# EAGLE board PCB_v35 (EAGLE 9.7.0)
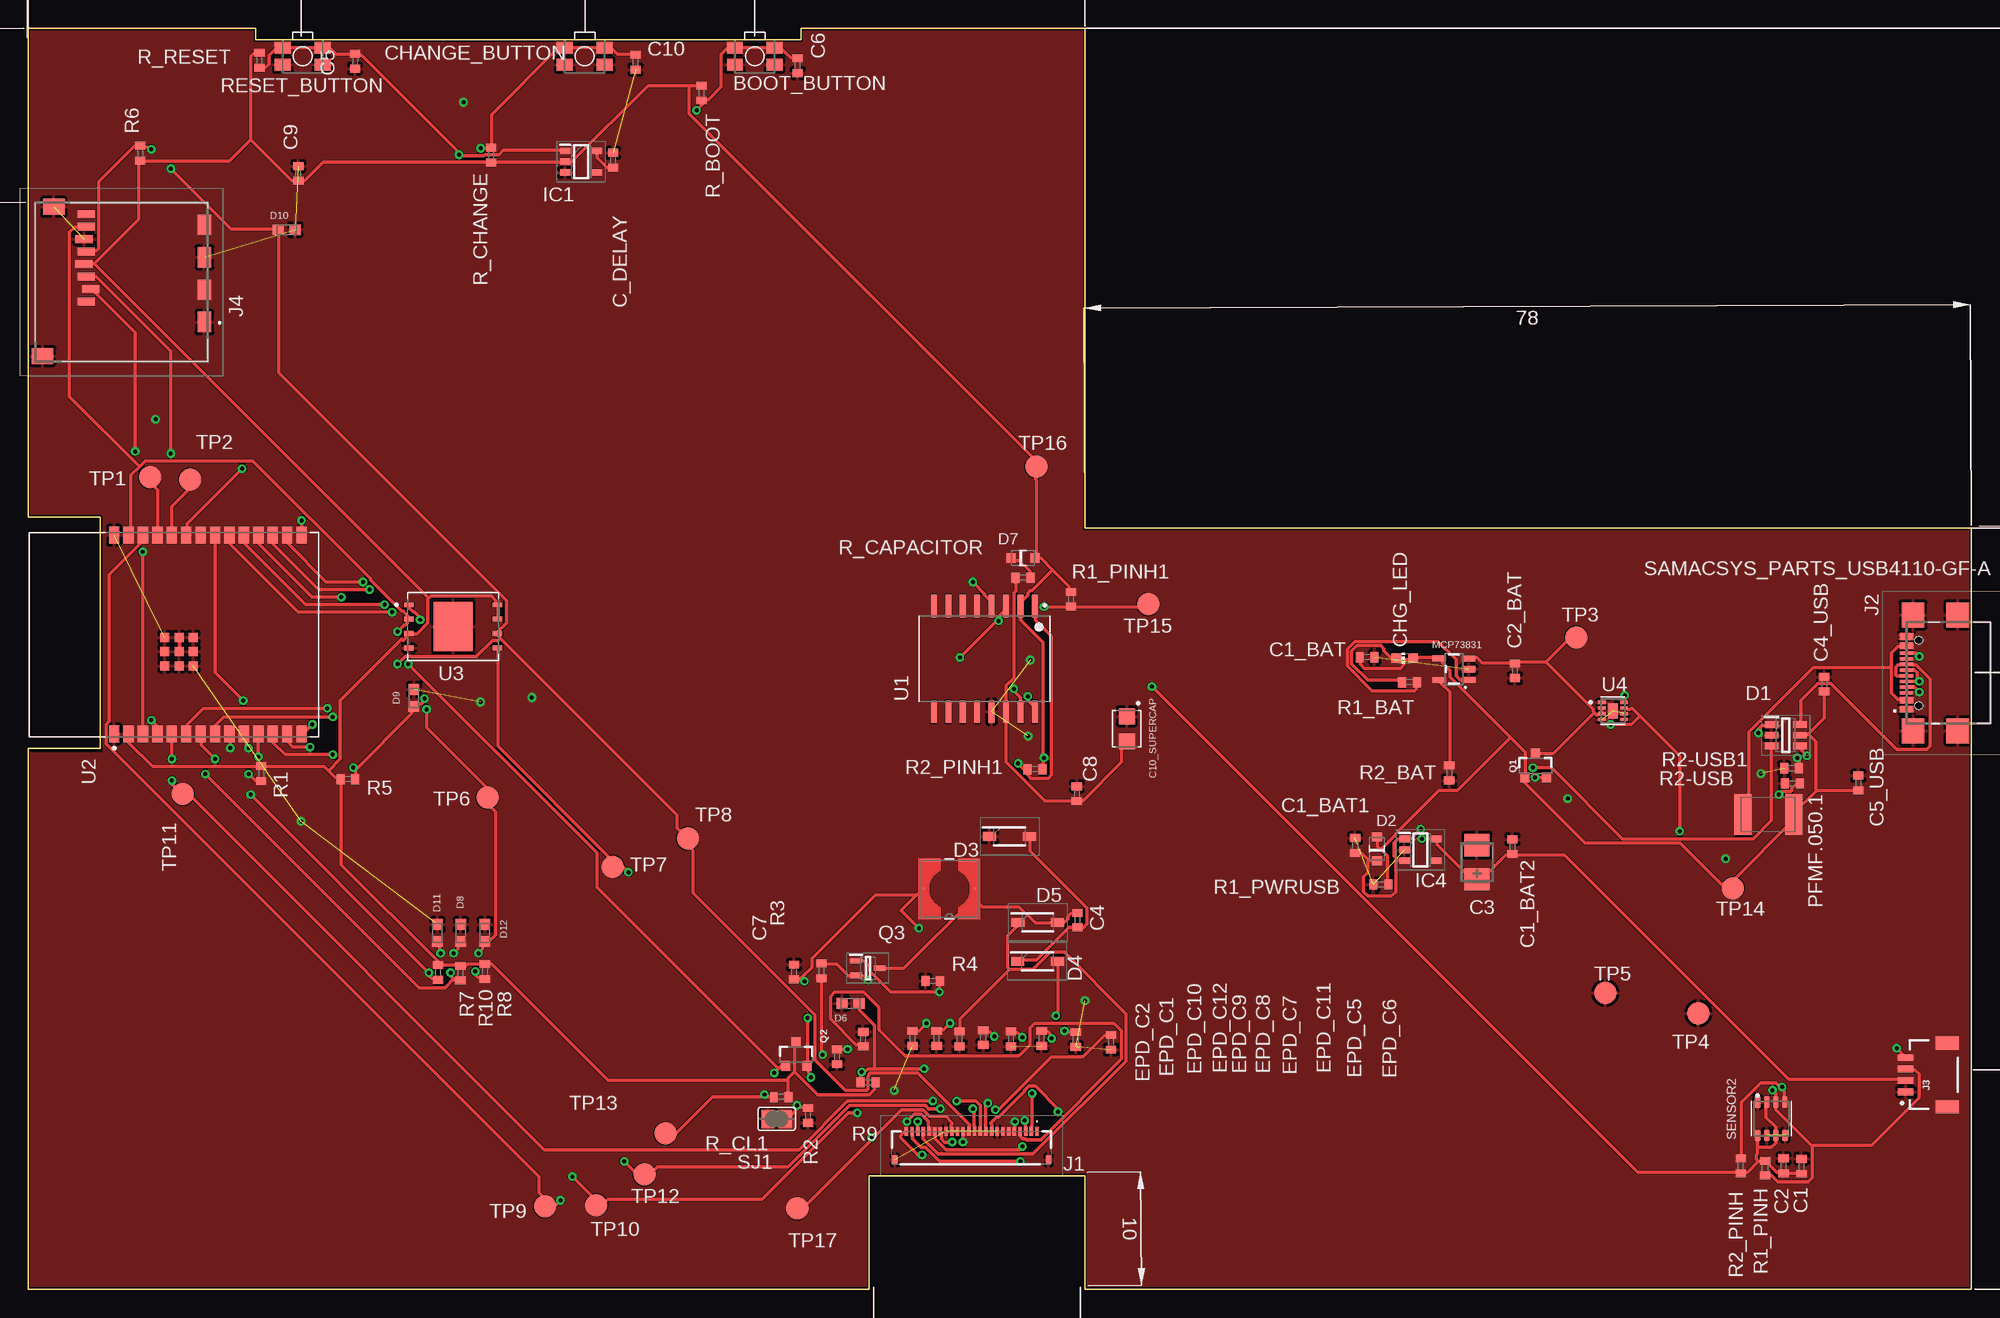
[diagram p0: board, top side]
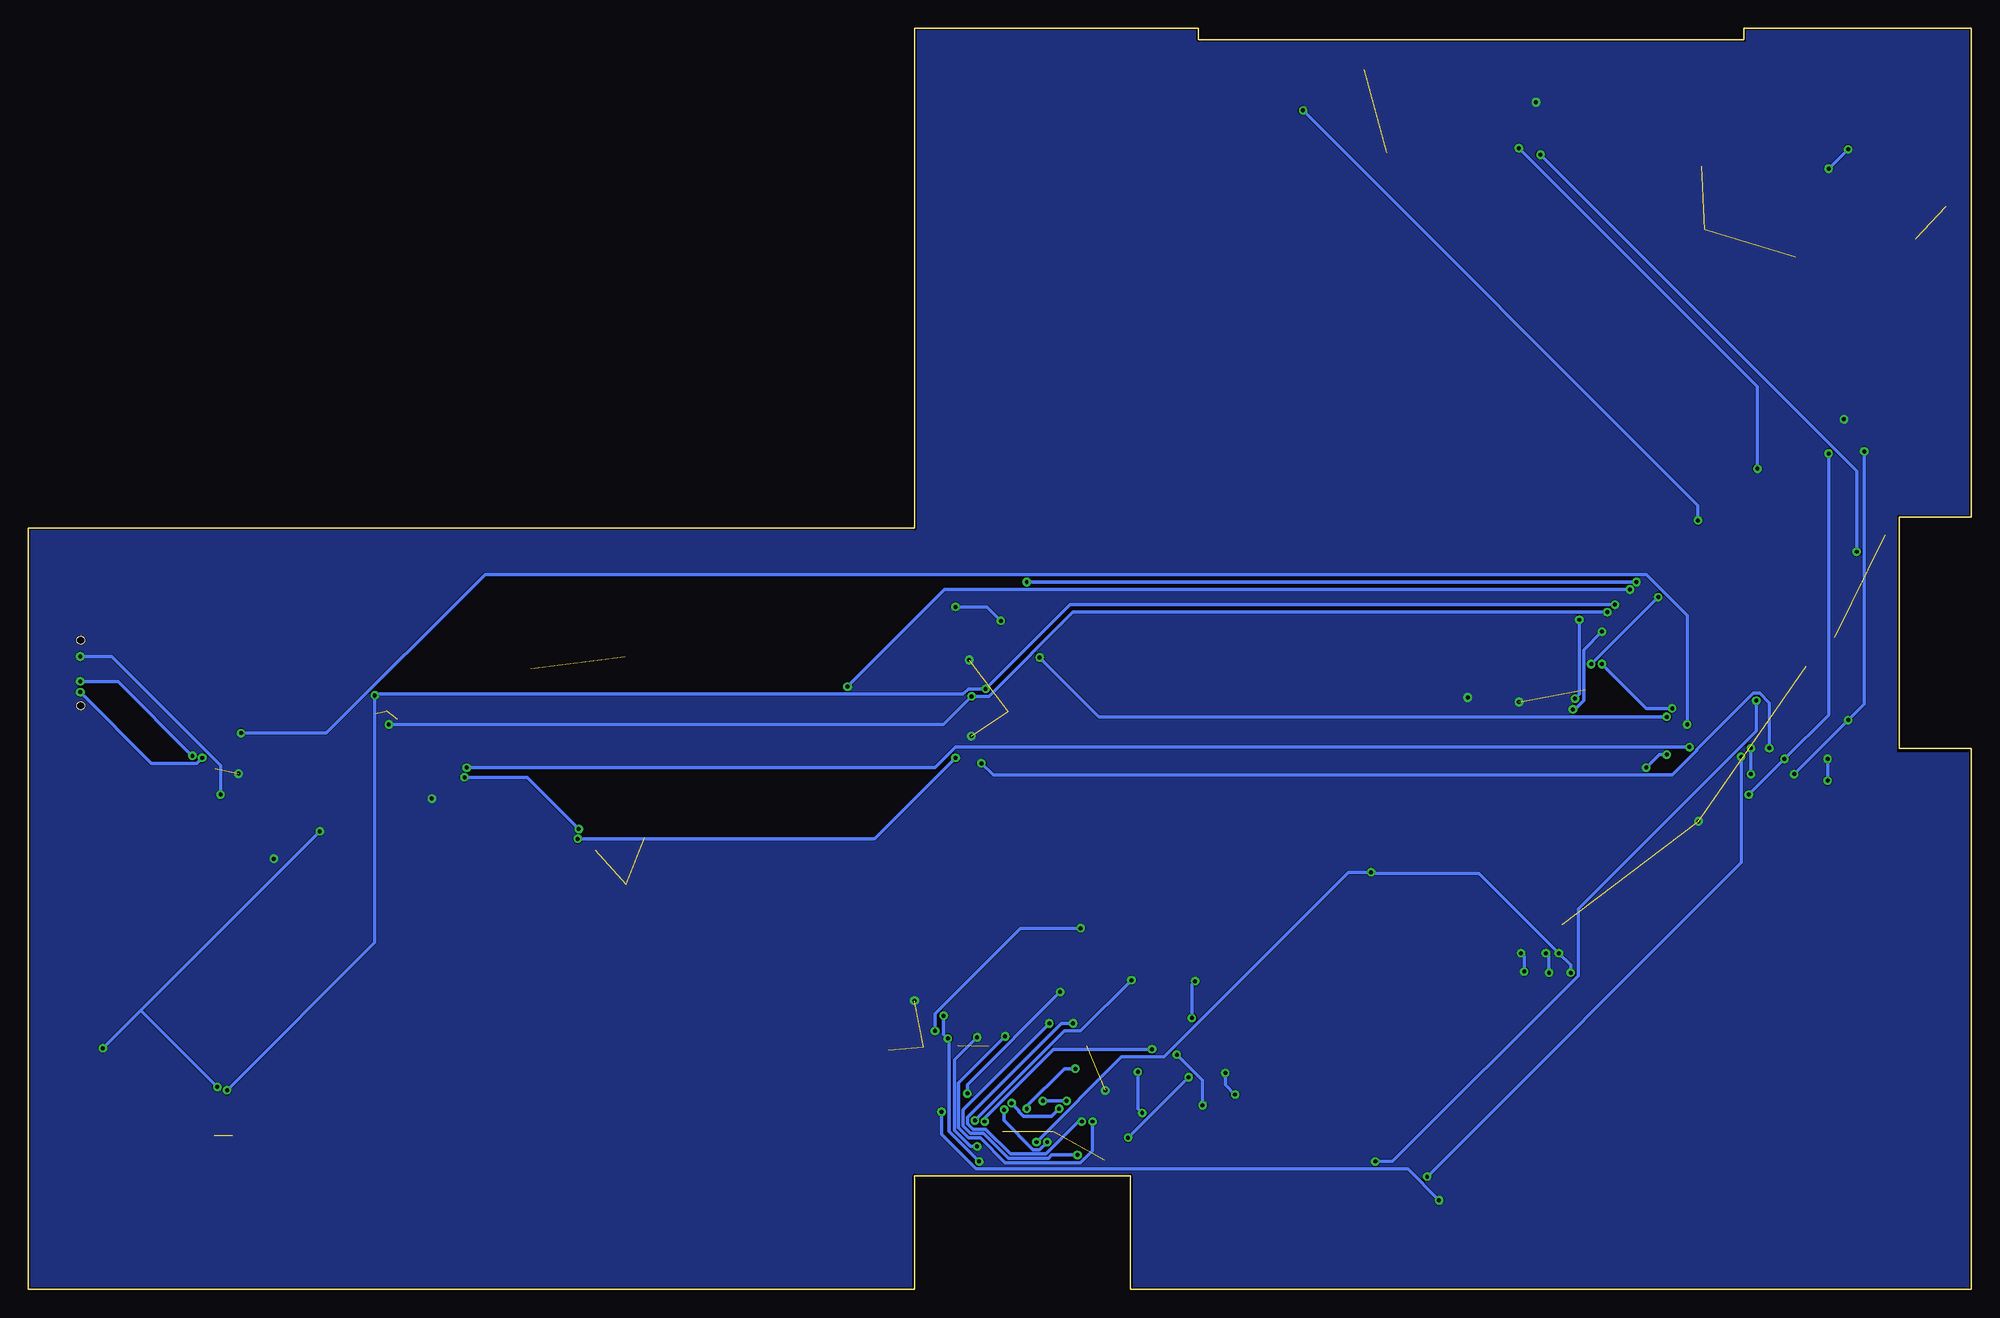
[diagram p1: board, bottom side, seen from below]

Size 171 x 111 mm. Coordinates in mm from the lower left corner, seen from the top.
Outline: 0,111 20,111 20,110 68,110 68,111 93,111 93,67 171,67 171,0 93,0 93,10 74,10 74,0 0,0 0,47.6 6.3,47.6 6.3,68 0,68 0,111
Copper layers (1*16): Top 0.035mm / dielectric 1.5mm / Bottom 0.035mm
Design rules "Fusion Electronics Design Rules *": minimum track width 0.05mm, minimum drill 0.35mm, track to track 0.05mm, track to pad 0.05mm, pad to pad 0.05mm, via to via 0.05mm, smd to smd 0.05mm, copper to edge 0.1mm, drill to drill 0.05mm, minimum pad ring 10mil, minimum via ring 8mil, stop-mask expansion 4mil, vias tented up to drill 0mil, thermal gap 10mil
Net classes: 0 default: width 0.05 mm; 1 power: width 0.3 mm; 2 special: width 0.05 mm; 3 ground: width 0.05 mm

## Footprints (pad centres in the part's own frame; a part is rotated, then mirrored left to right if it is on the bottom)
MYBUTTON = smd 1.4 x 1.05: 1 1.75,0.75; 2 -1.75,0.75; 3 -1.75,-0.75; 4 1.75,-0.75
ESP32_WROVER_EAGLE-LTSPICE_C0402 = smd 0.7 x 0.9: 1 -0.65,0; 2 0.65,0
RCL_CT3528 = smd 2 x 2.2: + -1.5,0; - 1.5,0
CAPCP3225X100N = smd 1.4 x 1.4: 1 -1.1,0; 2 1.1,0
ADAFRUIT_CHIP-LED0603 = smd 0.8 x 0.8: A 0,-0.75; C 0,0.75
SOT95P280X145-6N = smd 1.2 x 0.6: 1 -1.25,0.95; 2 -1.25,0; 3 -1.25,-0.95; 4 1.25,-0.95; 5 1.25,0; 6 1.25,0.95
ESP32_WROVER_AVX---SD0805S020S1R0_AVX_SD0805S020S1R0_0 = smd 0.8 x 0.9: 1 -1.05,0; 2 1.05,0
SOD3716X135N = smd 1.15 x 0.8: 1 -1.75,0; 2 1.75,0
DIOC1608X36N = smd 0.97 x 0.94: 1 -0.75,0; 2 0.75,0
SOT95P280X125-5N = smd 0.9 x 0.6: 1 -1.4,0.95; 2 -1.4,0; 3 -1.4,-0.95; 4 1.4,-0.95; 5 1.4,0.95
SOT95P280X120-5N = smd 0.9 x 0.6: 1 -1.4,0.95; 2 -1.4,0; 3 -1.4,-0.95; 4 1.4,-0.95; 5 1.4,0.95
FH34SRJ24S05SH99 = smd 0.3 x 0.8: 1 5.75,1.45; 2 5.25,1.45; 3 4.75,1.45; 4 4.25,1.45; 5 3.75,1.45; 6 3.25,1.45; 7 2.75,1.45; 8 2.25,1.45; 9 1.75,1.45; 10 1.25,1.45; 11 0.75,1.45; 12 0.25,1.45; 13 -0.25,1.45; 14 -0.75,1.45; 15 -1.25,1.45; 16 -1.75,1.45; 17 -2.25,1.45; 18 -2.75,1.45; 19 -3.25,1.45; 20 -3.75,1.45; 21 -4.25,1.45; 22 -4.75,1.45; 23 -5.25,1.45; 24 -5.75,1.45 | smd 0.4 x 0.8: MP1 6.75,-1.05; MP2 -6.75,-1.05
SAMACSYS_PARTS_USB4110GFA = smd 0.3 x 1.15: A1 -3.35,3.678; A4 -2.55,3.678; A5 -1.25,3.678; A6 -0.25,3.678; A7 0.25,3.678; A8 1.25,3.678; A9 2.55,3.678; A12 3.35,3.678; B1 3.05,3.678; B4 2.25,3.678; B5 1.75,3.678; B6 0.75,3.678; B7 -0.75,3.678; B8 -1.75,3.678; B9 -2.25,3.678; B12 -3.05,3.678 | smd 2.18 x 2: MP1 -5.11,-0.827; MP2 5.11,-0.827; MP3 -5.11,3.103; MP4 5.11,3.103 | hole 0.65: -2.89,2.603; 2.89,2.603
JST04_1MM_RA = smd 0.6 x 1.35: 1 -1.5,0; 2 -0.5,0; 3 0.5,0; 4 1.5,0 | smd 1.2 x 2: NC1 2.8,-3.675; NC2 -2.8,-3.675
112ATAARR03ATTEND = smd 1.8 x 1.2: G1 10.6,10.4; G2 4.9,10.4; S1 7.75,10.4; S2 2.05,10.4 | smd 1.4 x 1.9: G3 13.6,-3.85; G4 0.45,-2.85 | smd 0.7 x 1.5: P1 8.8,0; P2 7.7,0.4; P3 6.6,0; P4 5.5,-0.2; P5 4.4,0; P6 3.3,-0.2; P7 2.2,0; P8 1.1,0
IND_4828-WE-TPC_WRE = smd 0.127 x 0.127: 1 -2.286,0; 2 2.286,0
ESP32_WROVER_SPARKFUN-IC-POWER_SOT23-5 = smd 0.55 x 1.2: 1 -0.95,-1.3; 2 0,-1.3; 3 0.95,-1.3; 4 0.95,1.3; 5 -0.95,1.3
ESP32C6_VARISTOR_CT/CN1812 = smd 1.5 x 3.6: 1 -2.25,0; 2 2.25,0
ESP32_WROVER_SPARKFUN-DISCRETESEMI_SOT23-3 = smd 0.8 x 0.9: 1 -0.95,-1; 2 0.95,-1; 3 0,1.1
SOT65P210X110-3N = smd 1.05 x 0.5: 1 -1.05,0.65; 2 -1.05,-0.65; 3 1.05,0
ESP32_WROVER_EAGLE-LTSPICE_R0402 = smd 0.7 x 0.9: 1 -0.65,0; 2 0.65,0
ESP32_WROVER_BME680_PSON80P300X300X100-8N = smd 1.016 x 0.5: 1 1.458,1.2; 2 1.458,0.4; 3 1.458,-0.4; 4 1.458,-1.2; 5 -1.458,-1.22; 6 -1.458,-0.4; 7 -1.458,0.4; 8 -1.458,1.2
SJ = smd 1.168 x 1.6: 1 -0.762,0; 2 0.762,0
TP20R = smd 2 x 2: TP 0,0
SOIC127P1032X265-16N = smd 2.05 x 0.59: 1 -4.655,4.445; 2 -4.655,3.175; 3 -4.655,1.905; 4 -4.655,0.635; 5 -4.655,-0.635; 6 -4.655,-1.905; 7 -4.655,-3.175; 8 -4.655,-4.445; 9 4.655,-4.445; 10 4.655,-3.175; 11 4.655,-1.905; 12 4.655,-0.635; 13 4.655,0.635; 14 4.655,1.905; 15 4.655,3.175; 16 4.655,4.445
XCVR_ESP32-C6-WROOM-1-N8 = smd 1.5 x 0.9: 1 -8.75,5.26; 2 -8.75,3.99; 3 -8.75,2.72; 4 -8.75,1.45; 5 -8.75,0.18; 6 -8.75,-1.09; 7 -8.75,-2.36; 8 -8.75,-3.63; 9 -8.75,-4.9; 10 -8.75,-6.17; 11 -8.75,-7.44; 12 -8.75,-8.71; 13 -8.75,-9.98; 14 -8.75,-11.25; 15 8.75,-11.25; 16 8.75,-9.98; 17 8.75,-8.71; 18 8.75,-7.44; 19 8.75,-6.17; 20 8.75,-4.9; 21 8.75,-3.63; 22 8.75,-2.36; 23 8.75,-1.09; 24 8.75,0.18; 25 8.75,1.45; 26 8.75,2.72; 27 8.75,3.99; 28 8.75,5.26 | smd 0.8 x 0.8: 29_1 -2.755,0.79; 29_2 -1.505,0.79; 29_3 -0.255,0.79; 29_4 -2.755,-0.46; 29_5 -1.505,-0.46; 29_6 -0.255,-0.46; 29_7 -2.755,-1.71; 29_8 -1.505,-1.71; 29_9 -0.255,-1.71
SON127P600X800X80-9N = smd 0.94 x 0.44: 1 -3.895,1.905; 2 -3.895,0.635; 3 -3.895,-0.635; 4 -3.895,-1.905; 5 3.895,-1.905; 6 3.895,-0.635; 7 3.895,0.635; 8 3.895,1.905 | smd 3.4 x 4.3: 9 0,0
SON50P200X200X80-9N = smd 0.76 x 0.27: 1 -0.985,0.75; 2 -0.985,0.25; 3 -0.985,-0.25; 4 -0.985,-0.75; 5 0.985,-0.75; 6 0.985,-0.25; 7 0.985,0.25; 8 0.985,0.75 | smd 0.9 x 1.3: 9 0,0

## Placement (x,y rotation side)
BOOT_BUTTON  BUTTON_CUSYOMV1  [MYBUTTON]  63.93,108.55 180 top
C1  100nF  [ESP32_WROVER_EAGLE-LTSPICE_C0402]  156.07,10.84 90 top
C1_BAT  4.7uF  [ESP32_WROVER_EAGLE-LTSPICE_C0402]  117.83,55.65 0 top
C1_BAT1  4.7uF  [ESP32_WROVER_EAGLE-LTSPICE_C0402]  116.78,39.07 90 top
C1_BAT2  4.7uF  [ESP32_WROVER_EAGLE-LTSPICE_C0402]  130.62,38.97 90 top
C2  100nF  [ESP32_WROVER_EAGLE-LTSPICE_C0402]  154.48,10.86 90 top
C2_BAT  4.7uF  [ESP32_WROVER_EAGLE-LTSPICE_C0402]  130.84,54.45 270 top
C3  100uF TANT  [RCL_CT3528]  127.51,37.6 90 top
C4  4.7uF/25V  [ESP32_WROVER_EAGLE-LTSPICE_C0402]  92.35,32.49 90 top
C4_USB  100nF  [ESP32_WROVER_EAGLE-LTSPICE_C0402]  158.06,53.27 90 top
C5  1uF  [ESP32_WROVER_EAGLE-LTSPICE_C0402]  28.75,108.11 270 top
C5_USB  4.7uF  [ESP32_WROVER_EAGLE-LTSPICE_C0402]  161.07,44.57 90 top
C6  100nF  [ESP32_WROVER_EAGLE-LTSPICE_C0402]  67.71,107.71 270 top
C7  10uF  [ESP32_WROVER_EAGLE-LTSPICE_C0402]  67.39,27.93 270 top
C8  100nF  [ESP32_WROVER_EAGLE-LTSPICE_C0402]  92.28,43.63 270 top
C9  100nF  [ESP32_WROVER_EAGLE-LTSPICE_C0402]  23.76,98.23 90 top
C10  100nF  [ESP32_WROVER_EAGLE-LTSPICE_C0402]  53.44,108.03 270 top
C10_SUPERCAP  CPH3225A  [CAPCP3225X100N]  96.69,49.34 270 top
C_DELAY  100nF  [ESP32_WROVER_EAGLE-LTSPICE_C0402]  51.47,99.39 90 top
CHANGE_BUTTON  BUTTON_CUSYOMV1  [MYBUTTON]  48.96,108.55 180 top
CHG_LED  [ADAFRUIT_CHIP-LED0603]  121.14,55.55 90 top
D1  USBLC6-2SC6Y  [SOT95P280X145-6N]  154.68,48.77 0 top
D2  ESP32_WROVER_AVX---SD0805S020S1R0_AVX_SD0805S020S1R0_0_0AVX_SD0805S020S1R0_0_0  [ESP32_WROVER_AVX---SD0805S020S1R0_AVX_SD0805S020S1R0_0]  118.69,38.78 90 top
D3  MBR0530  [SOD3716X135N]  86.36,39.87 0 top
D4  MBR0530  [SOD3716X135N]  88.82,28.88 0 top
D5  MBR0530  [SOD3716X135N]  88.84,32.29 0 top
D6  PGB1010603MR  [DIOC1608X36N]  72.38,25.17 180 top
D7  ESP32_WROVER_AVX---SD0805S020S1R0_AVX_SD0805S020S1R0_0_0AVX_SD0805S020S1R0_0_0  [ESP32_WROVER_AVX---SD0805S020S1R0_AVX_SD0805S020S1R0_0]  87.54,64.38 0 top
D8  PGB1010603MR  [DIOC1608X36N]  38.06,31.37 90 top
D9  PGB1010603MR  [DIOC1608X36N]  33.94,52.07 90 top
D10  PGB1010603MR  [DIOC1608X36N]  22.72,93.27 0 top
D11  PGB1010603MR  [DIOC1608X36N]  36,31.37 90 top
D12  PGB1010603MR  [DIOC1608X36N]  40.18,31.37 90 top
EPD_C1  1uF/50V  [ESP32_WROVER_EAGLE-LTSPICE_C0402]  73.48,22.02 270 top
EPD_C2  1uF/50V  [ESP32_WROVER_EAGLE-LTSPICE_C0402]  71.18,20.47 90 top
EPD_C5  0.1uF/50V  [ESP32_WROVER_EAGLE-LTSPICE_C0402]  92.19,21.99 90 top
EPD_C6  1uF/50V  [ESP32_WROVER_EAGLE-LTSPICE_C0402]  95.29,21.75 90 top
EPD_C7  1uF/50V  [ESP32_WROVER_EAGLE-LTSPICE_C0402]  86.5,22.05 90 top
EPD_C8  1uF/50V  [ESP32_WROVER_EAGLE-LTSPICE_C0402]  84.05,22.15 90 top
EPD_C9  1uF/50V  [ESP32_WROVER_EAGLE-LTSPICE_C0402]  81.96,22.05 90 top
EPD_C10  1uF/50V  [ESP32_WROVER_EAGLE-LTSPICE_C0402]  77.81,22.09 90 top
EPD_C11  1uF/50V  [ESP32_WROVER_EAGLE-LTSPICE_C0402]  89.19,22.09 90 top
EPD_C12  1uF/50V  [ESP32_WROVER_EAGLE-LTSPICE_C0402]  79.95,22.09 90 top
IC1  BD5229G-TR  [SOT95P280X125-5N]  48.65,99.27 0 top
IC4  XC6220A331MR-G  [SOT95P280X120-5N]  122.53,38.69 0 top
J1  FH34SRJ-24S-0.5SH_99_  [FH34SRJ24S05SH99]  83.03,12.44 0 top
J2  SAMACSYS_PARTS_USB4110-GF-A  [SAMACSYS_PARTS_USB4110GFA]  169,54.26 90 top
J3  QWIIC_RIGHT_ANGLE  [JST04_1MM_RA]  165.23,18.89 90 top
J4  112A-TAAR-R03_ATTEND  [112ATAARR03ATTEND]  5.09,95.75 270 top
L1  68uH  [IND_4828-WE-TPC_WRE]  81.07,35.25 180 top
MCP73831  ESP32_WROVER_SPARKFUN-IC-POWER_MCP73831  [ESP32_WROVER_SPARKFUN-IC-POWER_SOT23-5]  125.48,54.59 90 top
PFMF.050.1  ESP32C6_VARISTORCN1812  [ESP32C6_VARISTOR_CT/CN1812]  153.14,41.8 0 top
Q1  20V/4.2A/52mΩ/1.4W  [ESP32_WROVER_SPARKFUN-DISCRETESEMI_SOT23-3]  132.66,46.06 0 top
Q2  20V/4.2A/52mΩ/1.4W  [ESP32_WROVER_SPARKFUN-DISCRETESEMI_SOT23-3]  67.58,20.66 0 top
Q3  SI1308EDL-T1-GE3  [SOT65P210X110-3N]  73.89,28.28 0 top
R1  10k  [ESP32_WROVER_EAGLE-LTSPICE_R0402]  20.49,45.41 90 top
R1_BAT  200  [ESP32_WROVER_EAGLE-LTSPICE_R0402]  121.55,53.45 0 top
R1_PINH  10k  [ESP32_WROVER_EAGLE-LTSPICE_R0402]  152.86,10.67 90 top
R1_PINH1  10k  [ESP32_WROVER_EAGLE-LTSPICE_R0402]  91.76,60.74 90 top
R1_PWRUSB  100k  [ESP32_WROVER_EAGLE-LTSPICE_R0402]  119.05,35.64 0 top
R2  2.2  [ESP32_WROVER_EAGLE-LTSPICE_R0402]  68.63,15.31 90 top
R2-USB  5k1  [ESP32_WROVER_EAGLE-LTSPICE_R0402]  155.27,44.53 180 top
R2-USB1  5k1  [ESP32_WROVER_EAGLE-LTSPICE_R0402]  155.2,45.87 0 top
R2_BAT  2k  [ESP32_WROVER_EAGLE-LTSPICE_R0402]  125.06,45.45 90 top
R2_PINH  10k  [ESP32_WROVER_EAGLE-LTSPICE_R0402]  150.74,10.87 270 top
R2_PINH1  10k  [ESP32_WROVER_EAGLE-LTSPICE_R0402]  88.61,45.79 0 top
R3  0.47  [ESP32_WROVER_EAGLE-LTSPICE_R0402]  69.81,28.03 90 top
R4  10k  [ESP32_WROVER_EAGLE-LTSPICE_R0402]  79.61,27.16 0 top
R5  10k  [ESP32_WROVER_EAGLE-LTSPICE_R0402]  28.13,44.91 180 top
R6  10k  [ESP32_WROVER_EAGLE-LTSPICE_R0402]  9.85,100.01 270 top
R7  10k  [ESP32_WROVER_EAGLE-LTSPICE_R0402]  36.07,27.89 90 top
R8  10k  [ESP32_WROVER_EAGLE-LTSPICE_R0402]  40.19,27.99 90 top
R9  10k  [ESP32_WROVER_EAGLE-LTSPICE_R0402]  73.91,18.21 0 top
R10  10k  [ESP32_WROVER_EAGLE-LTSPICE_R0402]  38.03,27.83 90 top
R_BOOT  10k  [ESP32_WROVER_EAGLE-LTSPICE_R0402]  59.25,105.31 90 top
R_CAPACITOR  15  [ESP32_WROVER_EAGLE-LTSPICE_R0402]  87.55,62.64 0 top
R_CHANGE  10k  [ESP32_WROVER_EAGLE-LTSPICE_R0402]  40.72,99.84 270 top
R_CL1  10k  [ESP32_WROVER_EAGLE-LTSPICE_R0402]  66.26,16.93 0 top
R_RESET  10k  [ESP32_WROVER_EAGLE-LTSPICE_R0402]  20.33,108.19 90 top
RESET_BUTTON  BUTTON_CUSYOMV1  [MYBUTTON]  24.14,108.55 180 top
SENSOR2  BME688  [ESP32_WROVER_BME680_PSON80P300X300X100-8N]  153.41,15.02 90 top
SJ1  [SJ]  65.86,14.99 0 top
TP1  TPTP20R  [TP20R]  10.71,71.49 0 top
TP2  TPTP20R  [TP20R]  14.23,71.29 0 top
TP3  TPTP20R  [TP20R]  136.25,57.39 0 top
TP4  TPTP20R  [TP20R]  146.97,24.29 0 top
TP5  TPTP20R  [TP20R]  138.79,26.09 0 top
TP6  TPTP20R  [TP20R]  40.41,43.29 0 top
TP7  TPTP20R  [TP20R]  51.43,37.19 0 top
TP8  TPTP20R  [TP20R]  58.05,39.69 0 top
TP9  TPTP20R  [TP20R]  45.47,7.29 0 top
TP10  TPTP20R  [TP20R]  49.98,7.41 0 top
TP11  TPTP20R  [TP20R]  13.59,43.59 90 top
TP12  TPTP20R  [TP20R]  54.23,10.11 0 top
TP13  TPTP20R  [TP20R]  56.08,13.71 0 top
TP14  TPTP20R  [TP20R]  150.03,35.31 0 top
TP15  TPTP20R  [TP20R]  98.58,60.31 0 top
TP16  TPTP20R  [TP20R]  88.73,72.41 0 top
TP17  TPTP20R  [TP20R]  67.68,7.11 0 top
U1  DS3231SN#  [SOIC127P1032X265-16N]  84.15,55.5 270 top
U2  ESP32-C6-WROOM-1-N8  [XCVR_ESP32-C6-WROOM-1-N8]  12.8,57.64 90 top
U3  W25Q512JVEIQ  [SON127P600X800X80-9N]  37.39,58.36 0 top
U4  MAX17048G+T10  [SON50P200X200X80-9N]  139.47,50.92 0 top

## Library data of the parts
BOOT_BUTTON CHANGE_BUTTON CHG_LED PFMF.050.1 RESET_BUTTON SJ1 TP1-TP17 = LibTSC
C1 C1_BAT C1_BAT1 C1_BAT2 C2 C2_BAT C4 C4_USB C5 C5_USB C6-C10 C_DELAY EPD_C1 EPD_C2 EPD_C5-EPD_C12 = LibTSC; SPICEMODEL: NONE; SPICEPREFIX: C
C3 = LibTSC; SPICEPREFIX: C
C10_SUPERCAP = LibTSC; AVAILABILITY: Not in stock; CHECK_PRICES: https://www.snapeda.com/parts/CPH3225A/Seiko+Instruments/view-part/?ref=eda; DESCRIPTION: 11 mF (EDLC) Supercapacitor 3.3 V 1210 (3225 Metric) - -; MF: Seiko Instruments; MP: CPH3225A; PACKAGE: 1210 Seiko; PRICE: None; PURCHASE-URL: https://www.snapeda.com/api/url_track_click_mouser/?unipart_id=562593&manufacturer=Seiko Instruments&part_name=CPH3225A&search_term=None; SNAPEDA_LINK: https://www.snapeda.com/parts/CPH3225A/Seiko+Instruments/view-part/?ref=snap
D1 = LibTSC; AVAILABILITY: In Stock; CHECK_PRICES: https://www.snapeda.com/parts/USBLC6-2SC6Y/STMicroelectronics/view-part/?ref=eda; DESCRIPTION: 17V Clamp 5A (8/20µs) Ipp Tvs Diode Surface Mount SOT-23-6; MF: STMicroelectronics; MP: USBLC6-2SC6Y; PACKAGE: SOT-23-6 STMicroelectronics; PRICE: None; SNAPEDA_LINK: https://www.snapeda.com/parts/USBLC6-2SC6Y/STMicroelectronics/view-part/?ref=snap
D2 D7 = LibTSC; CENTROID_NOT_SPECIFIED: No; DATASHEET: http://datasheets.avx.com/schottky.pdf; DIGIKEY_DESCRIPTION: DIODE SCHOTTKY 20V 1A 0805; DIGIKEY_PART_NUMBER: 478-7800-1-ND; LEAD_FREE: yes; MF: AVX; MOUSER_PART_NUMBER: 581-SD0805S020S1R0; PACKAGE: 0805 (2012 metric); PREFIX: D; ROHS: yes; TEMPERATURE_RANGE_HIGH: +125°C; TEMPERATURE_RANGE_LOW: -55°C
D3-D5 = LibTSC; AVAILABILITY: In Stock; CHECK_PRICES: https://www.snapeda.com/parts/MBR0530/Onsemi/view-part/?ref=eda; DESCRIPTION: Diode Schottky 30 V 500mA Surface Mount SOD-123; MF: ON Semiconductor; MP: MBR0530; PACKAGE: SOD-123-2 ON Semiconductor; PRICE: None; PURCHASE-URL: https://www.snapeda.com/api/url_track_click_mouser/?unipart_id=179458&manufacturer=ON Semiconductor&part_name=MBR0530&search_term=None; SNAPEDA_LINK: https://www.snapeda.com/parts/MBR0530/Onsemi/view-part/?ref=snap
D6 D8-D12 = LibTSC; AVAILABILITY: In Stock; CHECK_PRICES: https://www.snapeda.com/parts/PGB1010603MR/Littelfuse/view-part/?ref=eda; DESCRIPTION: 150V (Typ) Clamp - Ipp Tvs Diode Surface Mount 0603 (1608 Metric); MF: Littelfuse Inc.; MP: PGB1010603MR; PACKAGE: 0603 Littelfuse Inc.; PRICE: None; PURCHASE-URL: https://www.snapeda.com/api/url_track_click_mouser/?unipart_id=5659453&manufacturer=Littelfuse Inc.&part_name=PGB1010603MR&search_term=None; SNAPEDA_LINK: https://www.snapeda.com/parts/PGB1010603MR/Littelfuse/view-part/?ref=snap
IC1 = LibTSC; DESCRIPTION: Voltage Detector with Adjustable Delay Time: CMOS processes are utilized to develop high precision, low current consumption CMOS reset ICs that allow arbitrary setting of the delay time. The extensive lineup includes both Nch Open Drain and CMOS output types in a wide range of detection voltages (from 2.3V to 6.0V, in 0.1V steps), enabling selection of the ideal solution based on customer requirements. In addition, the entire series is of course both lead-free and RoHS-compliant.; HEIGHT: 1.25mm; MANUFACTURER_NAME: ROHM Semiconductor; MANUFACTURER_PART_NUMBER: BD5229G-TR; MOUSER_PART_NUMBER: 755-BD5229G-TR; MOUSER_PRICE-STOCK: https://www.mouser.co.uk/ProductDetail/ROHM-Semiconductor/BD5229G-TR?qs=4kLU8WoGk0vvnhrrYwdszw%3D%3D
IC4 = LibTSC; DESCRIPTION: LDO Voltage Regulators; HEIGHT: 1.2mm; MANUFACTURER_NAME: Torex; MANUFACTURER_PART_NUMBER: XC6220A331MR-G; MOUSER_PART_NUMBER: 865-XC6220A331MR-G; MOUSER_PRICE-STOCK: https://www.mouser.co.uk/ProductDetail/Torex-Semiconductor/XC6220A331MR-G?qs=AsjdqWjXhJ8ZSWznL1J0gg%3D%3D
J1 = LibTSC; DESCRIPTION: 24 Position FFC, FPC Connector Contacts, Top and Bottom 0.020" (0.50mm) Surface Mount, Right Angle; HEIGHT: 1.1mm; MANUFACTURER_NAME: Hirose; MANUFACTURER_PART_NUMBER: FH34SRJ-24S-0.5SH(99); MOUSER_PART_NUMBER: 798-FH34SRJ24S05SH99; MOUSER_PRICE-STOCK: https://www.mouser.co.uk/ProductDetail/Hirose-Connector/FH34SRJ-24S-0.5SH99?qs=vcbW%252B4%252BSTIpKBl5ap9J8Fw%3D%3D
J2 = LibTSC; DESCRIPTION: CONN USB 2.0 TYPE-C R/A SMT; HEIGHT: 3.26mm; MANUFACTURER_NAME: GCT (GLOBAL CONNECTOR TECHNOLOGY); MANUFACTURER_PART_NUMBER: USB4110-GF-A; MOUSER_PART_NUMBER: 640-USB4110-GF-A; MOUSER_PRICE-STOCK: https://www.mouser.co.uk/ProductDetail/GCT/USB4110-GF-A?qs=KUoIvG%2F9IlYiZvIXQjyJeA%3D%3D
J3 = LibTSC; PROD_ID: CONN-13694
J4 = LibTSC; DESCRIPTION: Micro SD Card Socket, Push-Push Type, Top Mount, SMT, H=1.83mm, 10u; HEIGHT: 1.9mm; MANUFACTURER_NAME: ATTEND; MANUFACTURER_PART_NUMBER: 112A-TAAR-R03 ATTEND
L1 = LibTSC; COPYRIGHT: Copyright (C) 2024 Ultra Librarian. All rights reserved.; MANUFACTURER_PART_NUMBER: 744043680; MFR_NAME: Wurth Electronics
MCP73831 = LibTSC; PROD_ID: IC-09995
Q1 Q2 = LibTSC; PROD_ID: TRAN-14388
Q3 = LibTSC; AVAILABILITY: In Stock; CHECK_PRICES: https://www.snapeda.com/parts/SI1308EDL-T1-GE3/Vishay+Siliconix/view-part/?ref=eda; DESCRIPTION: Si1308EDL-T1-GE3 N-channel MOSFET Transistor, 1.5 A, 30 V, 3-Pin SC-70 | Siliconix / Vishay SI1308EDL-T1-GE3; MF: Vishay Siliconix; MP: SI1308EDL-T1-GE3; PACKAGE: SOT-323 Vishay Semiconductor; PRICE: None; PURCHASE-URL: https://www.snapeda.com/api/url_track_click_mouser/?unipart_id=274603&manufacturer=Vishay Siliconix&part_name=SI1308EDL-T1-GE3&search_term=None; SNAPEDA_LINK: https://www.snapeda.com/parts/SI1308EDL-T1-GE3/Vishay+Siliconix/view-part/?ref=snap
R1 R1_BAT R1_PINH R1_PINH1 R1_PWRUSB R2 R2-USB R2-USB1 R2_BAT R2_PINH R2_PINH1 R3-R10 R_BOOT R_CAPACITOR R_CHANGE R_CL1 R_RESET = LibTSC; SPICEMODEL: NONE; SPICEPREFIX: R
SENSOR2 = LibTSC; AVAILABILITY: Unavailable; DESCRIPTION: Integrated Environmental Unit; MF: Bosch Sensortec; MP: BME680; PACKAGE: LGA-8 Bosch Tools; PRICE: None
U1 = LibTSC; AVAILABILITY: In Stock; CHECK_PRICES: https://www.snapeda.com/parts/DS3231SN%23/Analog+Devices/view-part/?ref=eda; DESCRIPTION: Extremely Accurate I²C-Integrated RTC/TCXO/Crystal; MF: Analog Devices; MP: DS3231SN#; PACKAGE: SOIC-16 Maxim; PRICE: None; PURCHASE-URL: https://www.snapeda.com/api/url_track_click_mouser/?unipart_id=99048&manufacturer=Analog Devices&part_name=DS3231SN#&search_term=None; SNAPEDA_LINK: https://www.snapeda.com/parts/DS3231SN%23/Analog+Devices/view-part/?ref=snap
U2 = LibTSC; AVAILABILITY: In Stock; CHECK_PRICES: https://www.snapeda.com/parts/ESP32-C6-WROOM-1-N8/Espressif+Systems/view-part/?ref=eda; DESCRIPTION: Multiprotocol Modules ESP32-C6 module, Wi-Fi 6 in 2.4 GHz band, Bluetooth 5, Zigbee 3.0 and Thread. ESP34-WROOM Compatible - ENGINEERING SAMPLE; MF: Espressif Systems; MP: ESP32-C6-WROOM-1-N8; PACKAGE: None; PRICE: None; SNAPEDA_LINK: https://www.snapeda.com/parts/ESP32-C6-WROOM-1-N8/Espressif+Systems/view-part/?ref=snap
U3 = LibTSC; AVAILABILITY: In Stock; CHECK_PRICES: https://www.snapeda.com/parts/W25Q512JVEIQ/Winbond+Electronics/view-part/?ref=eda; DESCRIPTION: FLASH - NOR Memory IC 512Mb (64M x 8) SPI - Quad I/O 133 MHz 8-WSON (8x6); MF: Winbond Electronics; MP: W25Q512JVEIQ; PACKAGE: Package; PRICE: None; SNAPEDA_LINK: https://www.snapeda.com/parts/W25Q512JVEIQ/Winbond+Electronics/view-part/?ref=snap
U4 = LibTSC; AVAILABILITY: In Stock; CHECK_PRICES: https://www.snapeda.com/parts/MAX17048G+T10/Analog+Devices/view-part/?ref=eda; DESCRIPTION: 3µA 1-Cell/2-Cell Fuel Gauge with ModelGauge; MF: Analog Devices; MP: MAX17048G+T10; PACKAGE: TDFN-8 Maxim; PRICE: None; PURCHASE-URL: https://www.snapeda.com/api/url_track_click_mouser/?unipart_id=329239&manufacturer=Analog Devices&part_name=MAX17048G+T10&search_term=None; SNAPEDA_LINK: https://www.snapeda.com/parts/MAX17048G+T10/Analog+Devices/view-part/?ref=snap

## Nets
3V3 [power]: C1_BAT2.1 C3.+ C9.1 D7.2 IC1.2 IC4.5 J3.2 J4.P4 Q2.3 R1.2 R1_PINH1.2 R2_PINH1.2 R5.2 R6.2 R7.2 R8.2 R9.2 R10.2 R_BOOT.2 R_CHANGE.2 R_CL1.2 R_RESET.2 TP16.TP U1.2 U2.2 U3.3 U3.7 U3.8
32KHZ: R2_PINH1.1 U1.1 U2.9
DN: D1.4 J2.A7 J2.B7
DP: D1.6 J2.A6 J2.B6
EPD_3V3 [special]: C7.2 EPD_C5.2 J1.15 J1.16 L1.2 Q2.2 TP17.TP
EPD_3V3_C: Q2.1 R_CL1.1 TP13.TP U2.18
EPD_BUSY: J1.9 TP9.TP U2.26
EPD_CS: D6.1 J1.12 R9.1 TP10.TP U2.11
EPD_DC: J1.11 TP11.TP U2.5
EPD_RST: J1.10 TP12.TP U2.21
FLASH_CS: D9.1 R5.1 U2.12 U3.1
GDR: J1.2 Q3.1 R4.2
GND [ground]: BOOT_BUTTON.1 BOOT_BUTTON.2 C1.2 C1_BAT1.2 C1_BAT2.2 C1_BAT.2 C2.2 C2_BAT.2 C3.- C4_USB.2 C5.2 C5_USB.2 C6.2 C7.1 C8.1 C9.2 C10.2 C10_SUPERCAP.1 C_DELAY.2 CHANGE_BUTTON.1 CHANGE_BUTTON.2 D1.2 D3.1 D6.2 D8.2 D9.2 D10.2 D11.2 D12.2 EPD_C1.1 EPD_C2.1 EPD_C5.1 EPD_C6.1 EPD_C7.1 EPD_C8.1 EPD_C9.1 EPD_C10.1 EPD_C11.1 EPD_C12.1 IC1.3 IC4.2 J1.8 J1.17 J1.MP1 J1.MP2 J2.A1 J2.A12 J2.B1 J2.B12 J2.MP1 J2.MP2 J2.MP3 J2.MP4 J3.1 J4.G1 J4.G2 J4.G3 J4.G4 J4.P6 MCP73831.2 R1_PWRUSB.1 R2-USB1.1 R2-USB.2 R2.1 R2_BAT.1 R4.1 RESET_BUTTON.1 RESET_BUTTON.2 SENSOR2.1 SENSOR2.5 SENSOR2.7 SJ1.1 TP4.TP TP5.TP U1.13 U2.1 U2.28 U2.29_1 U2.29_2 U2.29_3 U2.29_4 U2.29_5 U2.29_6 U2.29_7 U2.29_8 U2.29_9 U3.4 U3.9 U4.1 U4.4 U4.6 U4.9
GPIO8: R1.1 U2.10
I2C_PW: C1.1 C2.1 R1_PINH.2 R2_PINH.2 SENSOR2.2 SENSOR2.6 SENSOR2.8 U2.17
INT_RTC: R1_PINH1.1 TP15.TP U1.3 U2.8
IO/BOOT: BOOT_BUTTON.3 BOOT_BUTTON.4 C6.1 R_BOOT.1 U2.15
IO/CHANGE: C10.1 CHANGE_BUTTON.3 CHANGE_BUTTON.4 R_CHANGE.1 U2.23
MISO: D12.1 J4.P7 R8.1 TP6.TP U2.27 U3.2
MOSI: D11.1 J1.14 J4.P3 R7.1 TP7.TP U2.7 U3.5
N$1: J2.B5 R2-USB.1
N$2: J2.A5 R2-USB1.2
N$5: C1_BAT1.1 D2.1 IC4.1 IC4.3 Q1.2
N$8: MCP73831.1 R1_BAT.2
N$9: MCP73831.5 R2_BAT.2
N$10: CHG_LED.C R1_BAT.1
N$11: C4.1 D3.2 D4.1
N$12: EPD_C6.2 J1.18
N$13: EPD_C7.2 J1.19
N$14: EPD_C8.2 J1.20
N$15: C_DELAY.1 IC1.5
N$16: EPD_C10.2 J1.22
N$17: D7.1 R_CAPACITOR.2
N$18: EPD_C12.2 J1.24
N$21: EPD_C1.2 J1.4
N$22: EPD_C2.2 J1.5
PREVGH: D5.1 EPD_C9.2 J1.21
PREVGL: D4.2 EPD_C11.2 J1.23
RESE: J1.3 Q3.2 R3.2
RESE': R2.2 R3.1 SJ1.2
RESET: C5.1 IC1.1 R_RESET.1 RESET_BUTTON.3 RESET_BUTTON.4 U2.3
RTC_RST: U1.4 U2.16
RX: TP2.TP U2.24
SCK: D10.1 J1.13 J4.P5 R6.1 TP8.TP U2.6 U3.6
SCL: J3.4 R2_PINH.1 SENSOR2.4 U1.16 U2.20 U4.7
SDA: J3.3 R1_PINH.1 SENSOR2.3 U1.15 U2.19 U4.8
SRC [special]: C4.2 D5.2 L1.1 Q3.3
SS_SD: D8.1 J4.P2 R10.1 U2.4
TX: TP1.TP U2.25
USB_D+: D1.1 U2.14
USB_D-: D1.3 U2.13
VBAT: C2_BAT.1 MCP73831.3 Q1.3 TP3.TP U4.2 U4.3
VBUS [power]: C1_BAT.1 C4_USB.1 C5_USB.1 CHG_LED.A D1.5 D2.2 MCP73831.4 PFMF.050.1.2 Q1.1 R1_PWRUSB.2 TP14.TP
VRTC [power]: C8.2 C10_SUPERCAP.2 R_CAPACITOR.1 U1.14
VUSB [power]: J2.A4 J2.A9 J2.B4 J2.B9 PFMF.050.1.1

## Tracks (layer width: path | path; a pad name or v marks a point on that pad's centre or on a via)
3V3  (via drill 0.35)
  Top 0.3: 66.88,18.38 66.88,18.56 67.45,19.14 | 66.88,18.38 66.88,16.95 R_CL1.2 | 67.45,19.14 67.45,21.61 67.55,21.7 Q2.3 | 67.45,19.14 69.44,17.14 74,17.14 74.48,17.61 74.48,18.19 R9.2 | 35.24,60.84 35.44,61.03 40.76,61.03 41.13,60.65 41.13,60.27 41.23,60.17 U3.8 41.33,60.08 41.33,59.03 U3.7 | 35.24,60.84 35.15,60.74 35.15,58.66 34.2,57.7 33.53,57.7 U3.3 33.44,57.61 32.97,57.13 32.87,57.23 27.45,51.81 27.45,46.69 26.41,45.64 | 26.41,45.64 26.98,45.07 27.36,45.07 27.45,44.97 R5.2 27.55,44.78 27.55,37.38 36.01,28.92 36.01,28.64 R7.2 36.1,28.54 38,28.54 R10.2 38.09,28.35 38.38,28.35 38.66,28.64 R8.2 40.28,28.64 40.76,28.64 51.02,18.38 66.88,18.38 | 26.41,45.64 26.03,46.02 20.52,46.02 R1.2 20.43,46.02 10.93,46.02 8.84,48.11 8.84,48.87 U2.2 | J3.2 165.21,18.47 154.94,18.47 135.19,38.23 130.72,38.23 C1_BAT2.1 130.53,38.23 130.06,38.23 128.06,36.23 127.58,36.23 C3.+ 127.49,36.14 127.02,36.14 123.97,39.18 123.97,39.56 IC4.5 123.78,39.66 v122.64,39.66 | 90.16,63.31 91.58,61.88 91.58,61.51 91.67,61.41 R1_PINH1.2 | 90.16,63.31 89.11,64.35 88.64,64.35 D7.2 88.73,64.45 88.73,71.19 88.64,71.29 88.64,71.38 88.73,71.48 TP16.TP 88.64,72.53 88.64,73 58.14,103.5 58.14,105.97 | 89.3,46.78 89.3,56.95 87.31,58.94 87.31,60.08 U1.2 87.4,60.27 87.4,60.55 87.97,61.12 87.97,61.31 88.16,61.51 88.35,61.51 90.16,63.31 | 89.3,46.78 89.3,45.83 R2_PINH1.2 | 58.14,105.97 54.53,105.97 47.78,99.22 47.31,99.22 IC1.2 47.22,99.22 40.76,99.22 R_CHANGE.2 40.66,99.22 25.93,99.22 24.32,97.61 23.84,97.61 C9.1 23.75,97.61 23.18,97.61 19.57,101.22 | 58.14,105.97 59.19,105.97 R_BOOT.2
  Top 0.3: 19.57,101.22 19.57,108.53 19.95,108.91 20.33,108.91 R_RESET.2 | 19.57,101.22 17.67,99.31 9.88,99.31 R6.2 9.79,99.31 9.69,99.22 9.69,94.19 5.79,90.29 | 5.79,90.29 4.94,90.29 J4.P4 | v89.39,46.78 89.3,46.78 | 5.79,90.29 35.24,60.84
  Bottom 0.3: v122.64,39.66 96.52,39.66 v89.39,46.78
32KHZ  (via drill 0.35)
  Top 0.3: U1.1 88.64,60.08 88.64,58.94 90.06,57.52 90.06,45.26 89.78,44.97 88.25,44.97 87.97,45.26 87.97,45.73 R2_PINH1.1 87.88,45.55 v87.11,46.31 | v17.77,47.63 17.77,48.87 U2.9
  Bottom 0.3: v17.77,47.63 17.77,51.62 18.62,52.48 19.19,52.48 24.13,47.54 24.13,47.45 26.32,45.26 86.07,45.26 v87.11,46.31
DN  (via drill 0.35)
  Top 0.3: 166.25,53.62 166.16,53.52 165.4,53.52 J2.B7 | 166.25,53.62 166.25,54.28 165.97,54.57 165.87,54.57 165.78,54.48 165.4,54.48 J2.A7 | v156.56,46.97 155.99,47.54 155.99,47.73 D1.4 | v166.44,53.52 166.34,53.52 166.25,53.62
  Bottom 0.3: v156.56,46.97 163.12,53.52 v166.44,53.52
DP
  Top 0.3: J2.A6 165.3,54 164.44,54 164.35,54.09 164.35,54.76 164.54,54.95 164.73,54.95 164.82,55.05 165.3,55.05 J2.B6 165.4,55.05 165.78,55.05 165.87,54.95 166.16,54.95 167.39,53.72 167.39,47.83 167.1,47.54 164.44,47.54 158.65,53.34 157.51,53.34 155.99,51.81 155.99,49.73 D1.6
EPD_3V3  (via drill 0.35)
  Top 0.3: J1.15 81.7,13.91 81.32,13.91 J1.16 81.22,14 81.22,14.48 81.32,14.58 81.32,14.67 80.75,15.24 79.33,15.24 78.75,15.81 76.86,15.81 74.29,13.25 | 74.29,13.25 68.21,7.17 67.73,7.17 TP17.TP | 68.02,27.4 68.97,28.35 68.97,29.11 74.58,34.72 78.19,34.72 | 68.02,27.4 67.92,27.31 67.45,27.31 C7.2 | 78.19,34.72 76.82,33.35 v78.38,31.79 | 78.19,34.72 78.47,35 78.75,35.28 L1.2 | v68.59,23.89 68.59,19.7 Q2.2 68.69,19.61 68.69,19.04 68.88,18.85 v68.88,18.66 | 68.02,27.4 v68.31,27.11 | v91.2,22.75 91.3,22.65 92.15,22.65 EPD_C5.2 | v74.19,13.34 74.29,13.25
  Bottom 0.3: v68.59,23.89 68.59,26.83 v68.31,27.11 | v91.2,22.75 91.2,24.27 83.67,31.79 v78.38,31.79 | v68.88,18.66 v74.19,13.34
EPD_3V3_C  (via drill 0.35)
  Top 0.3: 64.79,16.95 60.23,16.95 57,13.72 56.15,13.72 TP13.TP | 64.79,16.95 65.55,16.95 R_CL1.1 | v65.64,19.04 66.03,19.42 | 66.03,19.42 66.22,19.61 66.59,19.61 Q2.1 | v64.79,17.14 64.79,16.95 | v27.55,60.94 24.98,60.94 20.33,65.59 20.33,66.35 U2.18 | v33.44,55.05 50.06,38.42 50.06,35.38 66.03,19.42
  Bottom 0.3: v65.64,19.04 65.64,18 v64.79,17.14 | v33.44,55.05 v27.55,60.94
EPD_BUSY  (via drill 0.35)
  Top 0.3: v90.63,15.62 90.63,15.91 88.64,17.9 88.06,17.9 87.69,17.52 87.69,17.42 85.41,15.14 85.22,15.14 84.74,14.67 84.74,14.58 84.83,14.48 84.83,13.91 J1.9 | v46.84,7.83 46.36,7.36 45.51,7.36 TP9.TP 45.41,7.45 45.41,8.02 44.94,8.5 44.94,9.92 6.84,48.02 6.84,49.73 7.12,50.01 7.12,62.93 10.07,65.88 10.07,66.35 U2.26
  Bottom 0.3: v90.63,15.62 90.63,13.62 87.59,10.58 49.59,10.58 v46.84,7.83
EPD_CS  (via drill 0.35)
  Top 0.3: v83.12,15.91 83.22,15.81 83.22,14.39 83.31,14.29 83.31,13.91 J1.12 | 74.48,19.42 73.91,19.42 73.53,19.04 | 74.48,19.42 v78.85,19.42 | 73.53,19.04 73.25,18.75 73.25,18.28 R9.1 | 74.48,19.42 74.48,23.22 73.15,24.55 73.15,25.12 D6.1 | v20.23,46.88 20.23,48.87 U2.11 | v47.88,9.92 49.97,7.83 49.97,7.45 TP10.TP 50.06,7.73 50.83,7.73 51.02,7.92 64.6,7.92 72.2,15.53 v72.96,15.53 | v73.34,19.14 73.44,19.14 73.53,19.04
  Bottom 0.3: v83.12,15.91 83.12,16.09 79.8,19.42 v78.85,19.42 | v20.23,46.88 20.23,37.56 v47.88,9.92 | v73.34,19.14 73.34,15.91 v72.96,15.53
EPD_DC  (via drill 0.35)
  Top 0.3: v81.7,16.57 83.41,16.57 83.79,16.19 83.79,13.91 J1.11 | v79.61,16.57 72.11,16.57 67.83,12.3 45.41,12.3 14.15,43.55 13.68,43.55 TP11.TP 13.49,43.64 12.63,44.5 v12.63,44.78 | v12.63,46.69 12.63,48.87 U2.5
  Bottom 0.3: v79.61,16.57 v81.7,16.57 | v12.63,44.78 v12.63,46.69
EPD_RST  (via drill 0.35)
  Top 0.3: v84.45,16.38 84.27,16.19 84.27,13.91 J1.10 | v80.28,15.91 79.23,15.91 78.94,16.19 72.3,16.19 66.88,10.78 55.38,10.78 54.72,10.11 TP12.TP 54.15,10.2 53.48,10.2 v52.44,11.25 | v18.91,51.81 16.43,54.28 16.43,66.35 U2.21
  Bottom 0.3: v84.45,16.38 83.79,15.72 83.79,15.62 83.41,15.24 80.94,15.24 v80.28,15.91 | v18.91,51.81 18.91,49.16 34.58,33.48 34.58,27.59 50.92,11.25 v52.44,11.25
FLASH_CS  (via drill 0.35)
  Top 0.3: 28.79,45.73 28.79,44.97 R5.1 | 28.79,45.73 33.73,50.67 33.73,51.05 33.91,51.24 D9.1 34.01,51.44 34.1,51.53 34.58,51.53 34.87,51.81 v34.87,52.01 | v34.48,58.94 34.48,59.13 34.01,59.6 33.91,59.6 33.53,59.98 33.53,60.17 U3.1 | v26.79,47.06 22.61,47.06 21.57,48.11 21.57,48.87 U2.12 | v28.59,45.92 28.79,45.73
  Bottom 0.3: v34.48,58.94 34.48,52.38 v34.87,52.01 | v26.79,47.06 27.45,47.06 v28.59,45.92
GDR  (via drill 0.35)
  Top 0.3: v88.35,17.23 88.35,14.39 88.25,14.29 88.25,13.91 J1.2 | R4.2 80.18,27.11 v80.18,26.17 75.91,26.17 74.1,27.97 74.1,28.35 73.53,28.92 72.86,28.92 Q3.1
  Bottom 0.3: v88.35,17.23 88.35,18 v80.18,26.17
GND  (via drill 0.35)  (23 unrouted)
  Top 0.3: U2.29_5 13.3,56.19 13.3,57.33 U2.29_6
  other vias: 44.3,52.1 39.8,51.7 24,41.2 38.3,104.5 11.2,76.6 88,48.7 135.5,43.2 149.4,37.9 152.5,45.4 93,25.4 76.2,17.5 88.2,55.4
  pour Top: 6.56,47.26 6.54,47.24 6.52,47.22 0.18,47.22 0.18,0.18 73.82,0.18 73.82,10.12 73.84,10.14 73.86,10.16 73.88,10.18 93.12,10.18 93.14,10.16 93.16,10.14 93.18,10.12 93.18,0.18 170.82,0.18 170.82,66.82 92.88,66.82 92.86,66.84 92.84,66.86 92.82,66.88 92.82,110.82 68.18,110.82 68.18,109.88 68.16,109.86 68.14,109.84 68.12,109.82 19.88,109.82 19.86,109.84 19.84,109.86 19.82,109.88 19.82,110.82 0.18,110.82 0.18,68.18 6.52,68.18 6.54,68.16 6.56,68.14 6.58,68.12 6.58,47.28
  pour Bottom: 6.56,47.26 6.54,47.24 6.52,47.22 0.18,47.22 0.18,0.18 73.82,0.18 73.82,10.12 73.84,10.14 73.86,10.16 73.88,10.18 93.12,10.18 93.14,10.16 93.16,10.14 93.18,10.12 93.18,0.18 170.82,0.18 170.82,66.82 92.88,66.82 92.86,66.84 92.84,66.86 92.82,66.88 92.82,110.82 68.18,110.82 68.18,109.88 68.16,109.86 68.14,109.84 68.12,109.82 19.88,109.82 19.86,109.84 19.84,109.86 19.82,109.88 19.82,110.82 0.18,110.82 0.18,68.18 6.52,68.18 6.54,68.16 6.56,68.14 6.58,68.12 6.58,47.28
GPIO8  (via drill 0.35)
  Top 0.3: v19.38,45.36 19.95,44.78 20.43,44.78 R1.1 | v19.38,47.63 19.19,47.83 19.19,48.68 19,48.87 U2.10
  Bottom 0.3: v19.38,47.63 v19.38,45.36
I2C_PW  (via drill 0.35)
  Top 0.3: C1.1 155.99,10.2 154.56,10.2 C2.1 154.38,10.3 153.9,10.3 152.95,11.25 R1_PINH.2 152.85,11.25 152.28,11.25 | 152.28,11.25 151.34,10.3 150.76,10.3 R2_PINH.2 150.67,10.3 141.65,10.3 v98.89,53.05 | 152.19,12.48 152.19,11.92 152.09,11.82 152.09,11.44 152.28,11.25 | 152.19,12.48 152.19,13.53 SENSOR2.8 | 152.19,12.48 153.43,12.48 153.81,12.86 153.81,13.53 SENSOR2.6 153.81,13.62 153.81,14.29 152.95,15.14 152.95,16.47 SENSOR2.2 | v30.02,61.6 25.55,61.6 21.57,65.59 21.57,66.35 U2.17
  Bottom 0.3: v30.02,61.6 90.34,61.6 v98.89,53.05
INT_RTC  (via drill 0.35)
  Top 0.3: TP15.TP 98.52,60.27 97.85,60.27 97.66,60.08 R1_PINH1.1 91.67,60.08 v89.39,60.08 | v26.79,50.39 17.2,50.39 16.43,49.63 16.43,48.97 U2.8 | 85.31,58.94 85.41,59.03 85.41,59.23 85.97,59.8 85.97,60.08 U1.3 | 85.31,58.94 v81.98,55.62 | v85.41,58.84 85.31,58.94
  Bottom 0.3: v26.79,50.39 76.76,50.39 v81.98,55.62 | v89.39,60.08 86.64,60.08 v85.41,58.84
IO/BOOT  (via drill 0.35)
  Top 0.3: C6.1 67.64,108.44 67.07,108.44 66.22,109.29 65.74,109.29 BOOT_BUTTON.3 65.55,109.29 62.32,109.29 BOOT_BUTTON.4 62.13,109.29 61.56,109.29 60.99,108.72 60.99,105.87 59.85,104.73 59.28,104.73 R_BOOT.1 59.47,104.64 59.47,104.44 v58.8,103.78 | v24.04,67.68 24.04,66.44 U2.15
  Bottom 0.3: v24.04,67.68 24.04,69.01 v58.8,103.78
IO/CHANGE  (via drill 0.35)
  Top 0.3: C10.1 53.39,108.72 51.87,108.72 51.3,109.29 50.73,109.29 CHANGE_BUTTON.3 50.63,109.29 47.31,109.29 CHANGE_BUTTON.4 47.12,109.29 46.65,109.29 40.76,103.4 40.76,100.55 R_CHANGE.1 40.66,100.45 v39.8,100.45 | v18.81,72.24 13.96,67.4 13.96,66.44 U2.23
  Bottom 0.3: v18.81,72.24 18.81,79.46 v39.8,100.45
MISO  (via drill 0.35)
  Top 0.3: v39.33,27.97 39.33,27.69 39.62,27.4 40.19,27.4 R8.1 | v39.62,29.58 39.99,29.97 39.99,30.44 40.09,30.53 D12.1 40.28,30.63 40.56,30.63 41.13,31.2 41.13,42.03 40.47,42.69 40.47,43.27 TP6.TP 40.28,43.36 40.28,44.22 35.05,49.44 v35.05,51.05 | 9.79,72.43 9.03,71.67 9.03,66.63 8.84,66.44 U2.27 | 9.79,72.43 10.26,72.91 19.76,72.91 30.11,62.55 30.11,62.45 32.87,59.7 32.97,59.7 33.44,59.23 33.44,59.03 U3.2 33.34,58.94 33.34,58.66 33.16,58.47 33.06,58.47 v32.49,57.9 | 9.79,72.43 3.61,78.6 3.61,93.05 4.08,93.52 5.04,93.52 J4.P7
  Bottom 0.3: v39.33,27.97 39.33,29.3 v39.62,29.58 | v35.05,51.05 34.87,51.05 34.1,51.81 34.1,56.28 v32.49,57.9
MOSI  (via drill 0.35)
  Top 0.3: v82.27,12.96 82.27,13.81 J1.14 | v52.82,36.71 52.34,37.19 51.49,37.19 TP7.TP 51.4,37.28 51.4,37.75 41.33,47.83 41.33,56.38 U3.5 | v36.29,29.58 36.29,29.87 36.2,29.97 36.2,30.34 36.01,30.53 D11.1 | R7.1 36.01,27.31 35.53,27.31 35.24,27.59 v35.24,27.88 v19.57,43.55 | v16.43,46.69 15.2,47.92 15.2,48.87 U2.7 | J4.P3 5.99,89.15 12.54,82.59 v12.54,73.57
  Bottom 0.3: v82.27,12.96 74.77,20.47 71.06,20.47 54.81,36.71 v52.82,36.71 52.73,36.61 43.32,36.61 v36.29,29.58 35.24,28.54 v35.24,27.88 | v19.57,43.55 v16.43,46.69 12.54,50.58 v12.54,73.57
N$1  (via drill 0.35)
  Top 0.3: v154.09,43.55 154.38,43.83 155.13,43.83 155.23,43.93 155.23,44.12 155.61,44.5 155.9,44.5 R2-USB.1 | v166.44,55.71 166.16,55.99 165.4,55.99 J2.B5
  Bottom 0.3: v154.09,43.55 154.09,46.11 163.69,55.71 v166.44,55.71
N$2  (via drill 0.35)
  Top 0.3: v155.71,46.78 155.9,46.59 155.9,45.92 R2-USB1.2 | v166.44,52.58 165.97,53.05 165.4,53.05 J2.A5
  Bottom 0.3: v155.71,46.78 156.18,46.31 160.17,46.31 v166.44,52.58
N$5  (via drill 0.35)
  Top 0.3: 117.99,37.75 118.66,37.75 D2.1 | 117.99,37.75 117.33,38.42 C1_BAT1.1 | 120.56,37.75 121.12,37.75 IC4.3 | 120.56,37.75 120.17,38.14 120.17,39.28 120.56,39.66 121.12,39.66 IC4.1 121.22,39.66 121.69,39.66 v122.55,40.51 | v132.62,45.07 133.57,45.07 Q1.2 | 117.99,37.75 117.89,37.66 117.89,36.71 117.52,36.33 117.52,35 117.89,34.62 119.98,34.62 120.36,35 120.36,37.56 120.56,37.75
  Bottom 0.3: v132.62,45.07 127.11,45.07 v122.55,40.51
N$8
  Top 0.3: R1_BAT.2 122.17,53.43 122.17,52.86 121.98,52.67 118.28,52.67 116.09,54.85 116.09,56.38 116.75,57.04 124.07,57.04 125.69,55.42 125.69,54 126.06,53.62 126.73,53.62 MCP73831.1
N$9
  Top 0.3: R2_BAT.2 125.11,46.11 125.11,52.58 124.26,53.43 124.26,53.62 MCP73831.5
N$10
  Top 0.3: CHG_LED.C 120.36,55.62 119.89,55.62 119.32,56.19 119.32,56.38 119.03,56.66 116.94,56.66 116.47,56.19 116.47,55.05 117.89,53.62 120.75,53.62 120.84,53.52 R1_BAT.1
N$11
  Top 0.3: D4.1 87.11,28.92 87.21,29.02 88.73,29.02 91.58,31.86 92.34,31.86 C4.1 92.44,31.86 92.91,31.86 93.19,32.15 93.19,33.58 88.16,38.61 88.16,39.84 D3.2
N$12  (via drill 0.35)
  Top 0.3: v81.32,12.96 80.66,12.96 80.37,13.25 80.37,13.81 J1.18 | v85.12,15.81 85.41,15.81 90.06,20.47 92.81,20.47 94.72,22.36 95.28,22.36 EPD_C6.2
  Bottom 0.3: v81.32,12.96 81.98,12.3 82.56,12.3 85.12,14.86 v85.12,15.81
N$13  (via drill 0.35)
  Top 0.3: v87.5,12.58 87.21,12.3 80.75,12.3 79.8,13.25 79.8,13.81 J1.19 | v87.5,22.17 87.11,22.56 86.64,22.56 86.55,22.65 EPD_C7.2
  Bottom 0.3: v87.5,12.58 88.06,12.58 89.49,14 89.49,20.18 v87.5,22.17
N$14  (via drill 0.35)
  Top 0.3: v77.33,14.77 78,15.43 78.56,15.43 79.23,14.77 79.23,13.91 J1.20 | v85.03,22.27 84.64,22.65 84.17,22.65 84.08,22.75 EPD_C8.2
  Bottom 0.3: v77.33,14.77 77.33,12.2 78.38,11.16 85.03,11.16 87.21,13.34 88.25,13.34 89.11,14.19 89.11,18.19 v85.03,22.27
N$15
  Top 0.3: IC1.5 50.06,100.17 50.06,99.6 50.92,98.75 51.4,98.75 C_DELAY.1
N$16  (via drill 0.35)
  Top 0.3: v78.28,14.77 J1.22 | v79.04,23.41 78.38,22.75 77.9,22.75 EPD_C10.2
  Bottom 0.3: v78.28,14.77 78.56,14.77 81.42,11.92 84.55,11.92 86.73,14.1 87.88,14.1 88.35,14.58 88.35,15.14 80.08,23.41 v79.04,23.41
N$17
  Top 0.3: R_CAPACITOR.2 88.16,62.65 88.16,63.22 87.21,64.16 86.73,64.16 86.55,64.35 D7.1
N$18  (via drill 0.35)
  Top 0.3: v78.66,11.82 78.28,11.82 76.76,13.34 76.76,13.53 77.05,13.81 77.23,13.81 J1.24 | v81.13,23.41 80.56,22.84 80.08,22.84 79.99,22.75 EPD_C12.2
  Bottom 0.3: v78.66,11.82 80.94,11.82 81.22,11.53 84.74,11.53 86.92,13.72 88.06,13.72 88.73,14.39 88.73,15.81 v81.13,23.41
N$21
  Top 0.3: EPD_C1.2 73.34,21.51 72.86,21.51 70.58,23.79 70.58,25.78 70.97,26.17 73.53,26.17 74.86,24.83 74.86,22.84 77.14,20.56 87.21,20.56 88.16,21.51 88.16,23.03 88.54,23.41 95.57,23.41 96.23,22.75 96.23,20.28 89.11,13.15 87.88,13.15 87.78,13.25 87.5,13.25 87.31,13.44 87.31,13.81 J1.4
N$22  (via drill 0.35)
  Top 0.3: v86.83,14.77 86.83,13.91 J1.5 | v72.11,21.13 71.25,21.13 EPD_C2.2
  Bottom 0.3: v86.83,14.77 86.83,15.05 80.75,21.13 v72.11,21.13
PREVGH
  Top 0.3: 86.36,28.16 88.44,28.16 89.97,29.68 91.2,29.68 96.61,24.27 96.61,20.08 88.44,11.92 80.08,11.92 78.75,13.25 78.75,13.81 J1.21 | 86.36,28.16 86.17,28.35 86.17,31.11 87.02,31.96 87.02,32.25 D5.1 | 86.36,28.16 81.98,23.79 81.98,22.75 EPD_C9.2
PREVGL  (via drill 0.35)
  Top 0.3: v87.31,11.25 80.18,11.25 78.94,12.48 78.56,12.48 77.81,13.25 77.81,13.81 J1.23 | v90.06,22.08 90.06,22.36 89.78,22.65 89.2,22.65 EPD_C11.2 | v90.44,24.08 90.63,24.27 90.63,28.83 D4.2
  Bottom 0.3: v87.31,11.25 89.97,13.91 89.97,21.98 v90.06,22.08 90.44,22.46 v90.44,24.08
RESE  (via drill 0.35)
  Top 0.3: J1.3 87.78,14.77 v87.69,14.86 | v73.91,27.21 73.53,27.59 72.86,27.59 Q3.2 72.77,27.59 72.2,27.59 71.16,28.64 69.83,28.64 R3.2
  Bottom 0.3: v87.69,14.86 79.8,22.75 78.38,22.75 v73.91,27.21
RESE'  (via drill 0.35)
  Top 0.3: 67.83,16 68.59,16 R2.2 | 67.83,16 66.88,15.05 66.69,15.05 SJ1.2 | v69.92,20.66 69.83,20.75 69.83,27.31 R3.1 | v67.64,16.19 67.83,16
  Bottom 0.3: v69.92,20.66 67.64,18.38 v67.64,16.19
RESET  (via drill 0.35)
  Top 0.3: R_RESET.1 20.33,107.58 20.9,107.58 21.18,107.86 21.18,108.62 21.85,109.29 22.32,109.29 RESET_BUTTON.4 22.52,109.29 25.75,109.29 RESET_BUTTON.3 25.93,109.29 26.5,109.29 27.07,108.72 28.69,108.72 C5.1 28.79,108.62 29.36,108.62 38,99.98 | 38,99.98 38.19,99.79 40.09,99.79 40.19,99.89 41.42,99.89 41.8,100.27 47.22,100.27 IC1.1 | v10.07,64.92 10.07,48.97 U2.3 | v37.91,99.89 38,99.98
  Bottom 0.3: v10.07,64.92 10.07,72.05 v37.91,99.89
RTC_RST  (via drill 0.35)
  Top 0.3: v29.45,62.27 26.22,62.27 22.8,65.69 22.8,66.35 U2.16 | v83.12,62.27 84.17,61.22 84.17,61.12 84.74,60.55 84.74,60.17 U1.4
  Bottom 0.3: v83.12,62.27 v29.45,62.27
RX
  Top 0.3: U2.24 12.63,66.44 12.63,68.91 14.15,70.44 14.15,71.29 TP2.TP
SCK  (via drill 0.35)
  Top 0.3: J4.P5 5.13,91.43 5.99,91.43 6.17,91.62 6.17,97.51 9.31,100.64 9.79,100.64 R6.1 9.88,100.55 10.45,100.55 10.64,100.36 v10.83,100.36 | v12.54,98.65 17.86,93.33 21.95,93.33 D10.1 22.04,93.14 22.04,80.69 42.09,60.65 42.09,58.66 41.23,57.8 U3.6 41.33,57.7 41.33,57.52 41.52,57.33 | J1.13 82.75,13.91 82.75,14.29 82.84,14.39 82.84,14.48 78.28,19.04 74.1,19.04 74,18.94 74,18.85 73.91,18.75 73.91,17.61 73.81,17.52 71.92,17.52 69.25,20.18 69.25,24.17 58.52,34.91 58.52,38.61 58.42,38.7 58.42,38.8 58.14,39.08 58.14,39.66 TP8.TP 57.95,39.75 57.09,40.61 57.09,41.75 41.52,57.33 | v26.32,51.15 15.39,51.15 13.96,49.73 13.96,48.97 U2.6 | v32.49,55.05 33.16,55.71 39.42,55.71 40.85,57.13 41.33,57.13 41.52,57.33
  Bottom 0.3: v10.83,100.36 v12.54,98.65 | v26.32,51.15 28.59,51.15 v32.49,55.05
SCL  (via drill 0.35)
  Top 0.3: 154.28,17.71 154.56,17.42 154.56,16.57 SENSOR2.4 | 154.28,17.71 153.81,18.19 152.47,18.19 150.76,16.47 150.76,11.53 R2_PINH.1 | 141.84,50.48 145.35,46.97 v145.35,40.32 | 141.84,50.48 141.17,51.15 141.07,51.15 140.98,51.05 140.79,51.05 140.69,51.15 140.5,51.15 U4.7 | v164.44,21.22 165.11,20.56 165.11,20.47 165.21,20.37 J3.4 | v154.38,17.81 154.28,17.71 | v32.02,59.6 23.75,59.6 17.77,65.59 17.77,66.35 U2.20 | v87.97,52.2 87.97,51.81 88.54,51.24 88.54,50.87 U1.16 | 141.84,50.48 141.07,49.73 v139.27,49.73
  Bottom 0.3: v164.44,21.22 161.12,24.55 | 161.12,24.55 v145.35,40.32 | 161.12,24.55 v154.38,17.81 | v32.02,59.6 79.04,59.6 86.45,52.2 v87.97,52.2 90.44,49.73 v139.27,49.73
SDA  (via drill 0.35)
  Top 0.3: v140.5,52.29 140.5,51.72 U4.8 | v153.52,17.52 153.81,17.23 153.81,16.57 SENSOR2.3 153.81,16.38 153.81,15.81 157.03,12.58 | 157.03,12.58 157.03,9.83 156.66,9.44 154,9.44 153.43,10.02 152.95,10.02 R1_PINH.1 | J3.3 165.3,19.33 166.06,19.33 166.44,18.94 166.44,16.86 162.26,12.67 157.13,12.67 157.03,12.58 | v31.35,60.27 24.41,60.27 19,65.69 19,66.35 U2.19 | v86.73,52.86 86.73,52.67 87.31,52.1 87.31,50.87 U1.15
  Bottom 0.3: v153.52,17.52 140.5,30.53 v140.5,52.29 140.41,52.38 88.73,52.38 88.25,52.86 v86.73,52.86 79.33,60.27 v31.35,60.27
SRC
  Top 0.3: C4.2 92.34,33.1 91.77,33.1 91.48,32.81 91.48,32.62 91.11,32.25 90.63,32.25 D5.2 90.44,32.25 88.64,32.25 87.21,33.67 83.98,33.67 83.22,34.43 | 83.22,34.43 83.31,34.53 83.31,35.19 L1.1 | 83.22,34.43 77.05,28.25 74.95,28.25 Q3.3
SS_SD  (via drill 0.35)
  Top 0.3: 37.43,27.31 37.15,27.59 v37.15,27.88 | 37.43,27.31 37.52,27.21 38,27.21 R10.1 | v37.43,29.58 37.81,29.97 37.81,30.34 38,30.53 D8.1 | v9.4,73.76 9.4,84.21 5.61,88.01 5.51,88.01 J4.P2 | v10.83,50.1 11.4,49.53 11.4,48.97 U2.4 | 37.43,27.31 36.67,26.55 34.39,26.55 v15.58,45.36
  Bottom 0.3: v37.15,27.88 37.15,29.3 v37.43,29.58 | v9.4,73.76 9.4,51.53 v10.83,50.1 v15.58,45.36
TX
  Top 0.3: U2.25 11.4,66.44 11.4,70.34 10.73,71 10.73,71.48 TP1.TP
USB_D+  (via drill 0.35)
  Top 0.3: v152.28,48.97 152.28,49.34 152.57,49.63 153.43,49.63 D1.1 | v24.98,49.73 24.13,48.87 U2.14
  Bottom 0.3: v152.28,48.97 144.78,48.97 130.81,62.93 28.59,62.93 24.98,59.32 v24.98,49.73
USB_D-  (via drill 0.35)
  Top 0.3: v132.43,45.92 134.04,45.92 140.31,39.66 151.81,39.66 153.43,41.27 153.43,47.73 D1.3 | v24.8,47.73 23.27,47.73 22.8,48.2 22.8,48.87 U2.13
  Bottom 0.3: v132.43,45.92 91.2,45.92 89.39,47.73 v24.8,47.73
VBAT
  Top 0.3: 138.51,50.87 138.51,51.15 U4.2 | 138.51,50.87 138.51,50.67 U4.3 | Q1.3 134.24,47.16 137.84,50.77 | 137.84,50.77 138.03,50.58 138.13,50.58 138.41,50.87 138.51,50.87 | MCP73831.3 126.83,55.62 127.49,55.62 127.97,55.14 130.81,55.14 C2_BAT.1 130.91,55.23 133.57,55.23 | 133.57,55.23 135.66,57.33 136.23,57.33 TP3.TP | 133.57,55.23 137.75,51.05 137.75,50.87 137.84,50.77
VBUS
  Top 0.3: 156.66,48.87 156.47,48.68 155.99,48.68 D1.5 | 156.66,48.87 158.08,50.3 158.08,52.58 C4_USB.1 | 157.41,43.93 161.03,43.93 C5_USB.1 | 157.41,43.93 155.32,41.84 PFMF.050.1.2 155.23,41.75 155.23,41.17 150.1,36.05 150.1,35.38 TP14.TP 150,35.67 148.96,35.67 145.35,39.28 136.99,39.28 131.57,44.69 131.57,44.97 Q1.1 131.76,45.07 131.76,47.26 130.44,48.59 | 156.66,48.87 157.32,48.2 157.32,44.03 157.41,43.93 | 119.03,38.7 119.61,38.14 119.61,35.76 119.7,35.67 R1_PWRUSB.2 | 119.03,38.7 118.75,38.99 118.75,39.75 D2.2 | C1_BAT.1 117.23,55.62 117.23,55.05 117.61,54.66 120.75,54.66 121.12,55.05 121.12,55.23 121.31,55.42 121.89,55.42 CHG_LED.A 121.98,55.62 124.17,55.62 MCP73831.4 124.26,55.62 124.45,55.42 124.45,55.14 125.11,54.48 125.11,53.91 130.44,48.59 | 119.03,38.7 120.36,40.03 120.36,40.13 124.17,43.93 125.78,43.93 130.44,48.59
VRTC
  Top 0.3: C10_SUPERCAP.2 96.61,48.2 96.23,47.83 96.23,46.4 92.81,42.98 C8.2 89.49,42.98 86.07,46.4 86.07,50.77 U1.14 86.07,50.87 86.07,53.15 86.73,53.81 86.73,61.31 86.92,61.51 86.92,62.55 R_CAPACITOR.1
VUSB
  Top 0.3: J2.A4 165.4,51.72 165.4,52.01 J2.B9 165.21,52.01 164.82,52.01 164.73,51.91 164.54,51.91 163.97,52.48 163.97,54.76 | J2.A9 165.4,56.76 165.4,56.56 J2.B4 165.21,56.56 164.54,56.56 163.97,55.99 163.97,54.76 | 163.97,54.76 157.13,54.76 151.43,49.06 151.43,42.31 150.96,41.84 PFMF.050.1.1